# EAGLE board Hauptplatine (EAGLE 7.1.0)
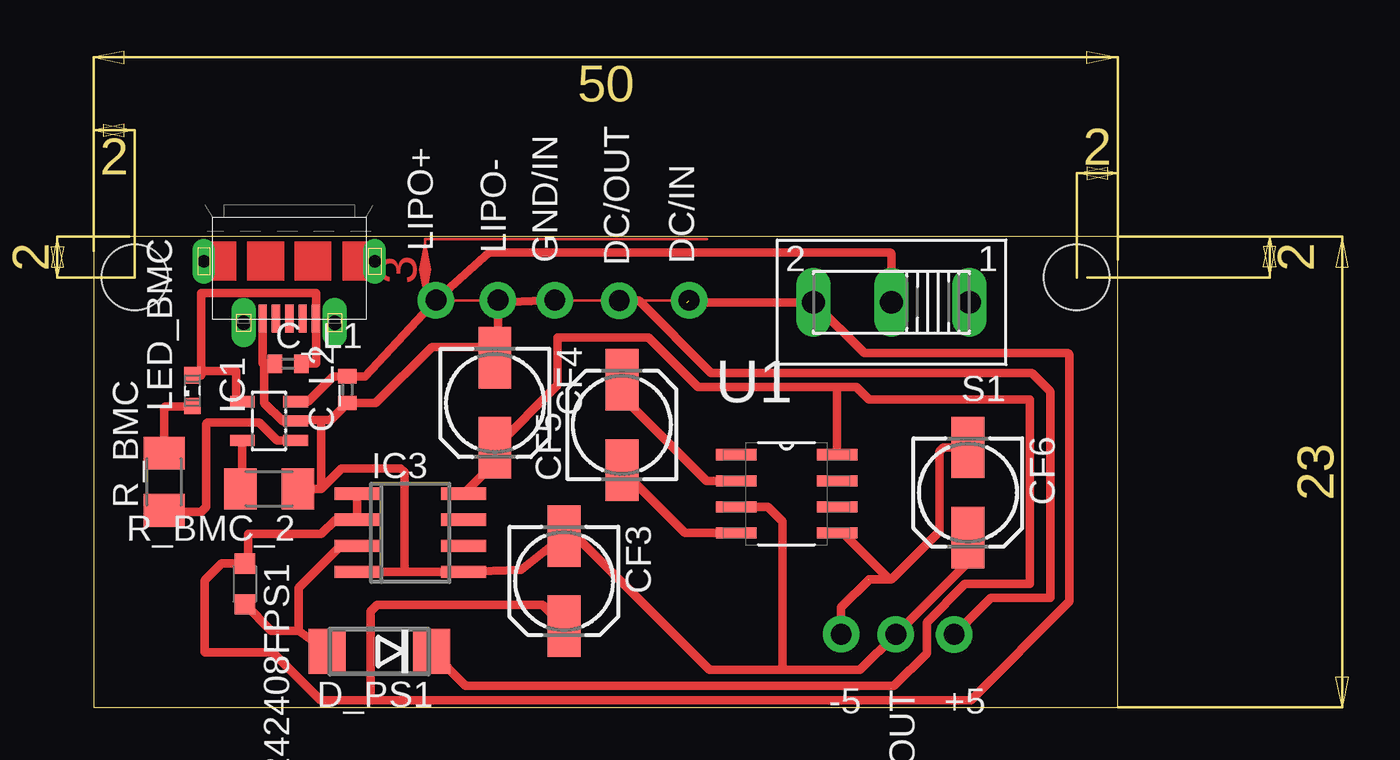
[diagram p0: board, top side]

Size 50 x 23 mm. Coordinates in mm from the lower left corner, seen from the top.
Outline: 0,0 50,0 50,23 0,23 0,0
Copper layers (1*16): Top 0.035mm / dielectric 1.5mm / Bottom 0.035mm
Design rules "default": minimum track width 10mil, minimum drill 24mil, track to track 8mil, track to pad 8mil, pad to pad 8mil, via to via 8mil, smd to smd 8mil, copper to edge 40mil, drill to drill 8mil, minimum pad ring 10mil, minimum via ring 8mil, stop-mask expansion 4mil, vias tented up to drill 0mil, thermal gap 10mil
Holes 3.2 mm at 2,21 48,21

## Footprints (pad centres in the part's own frame; a part is rotated, then mirrored left to right if it is on the bottom)
1X01-CLEANBIG = drill 1.016 pad 1.778: 1 0,0
C0402 = smd 0.7 x 0.9: 1 -0.65,0; 2 0.65,0
153CLV-0505 = smd 3 x 1.6: + 2.2,0; - -2.2,0
DO214AA = smd 1.8 x 2.2: A 2.55,0; C -2.55,0
SOT23-5L = smd 0.55 x 1.2: 1 -0.95,-1.3; 2 0,-1.3; 3 0.95,-1.3; 4 0.95,1.3; 5 -0.95,1.3
SO08 = smd 0.6 x 2.2: 1 -1.905,-2.6; 2 -0.635,-2.6; 3 0.635,-2.6; 4 1.905,-2.6; 5 1.905,2.6; 6 0.635,2.6; 7 -0.635,2.6; 8 -1.905,2.6
L2012C = smd 1 x 1: 1 -1,0; 2 1,0
LED_SML0603 = smd 0.8 x 0.8: A 0.75,0; C -0.75,0
M1206 = smd 1.6 x 2: 1 -1.4,0; 2 1.4,0
255SB = drill 1.118 long: 1 -3.81,0; 2 0,0; 3 3.81,0
SOIC127P600X175-8N = smd 1.981 x 0.559: 1 -2.464,1.905; 2 -2.464,0.635; 3 -2.464,-0.635; 4 -2.464,-1.905; 5 2.464,-1.905; 6 2.464,-0.635; 7 2.464,0.635; 8 2.464,1.905
47589-0001 = smd 1.35 x 0.4: 1 2.8,1.3; 2 2.8,0.65; 3 2.8,0; 4 2.8,-0.65; 5 2.8,-1.3 | drill 0.6 pad 0.95 long: CASING1 0,4.175; CASING2 0,-4.175 | drill 0.7 pad 1.1 long: CASING3 3,2.225; CASING4 3,-2.225

## Placement (x,y rotation side)
+5  [1X01-CLEANBIG]  42.02,3.56 0 top
-5  [1X01-CLEANBIG]  36.5,3.57 0 top
C_L1  4,7uF  [C0402]  9.49,16.79 0 top
C_L2  4,7uF  [C0402]  12.39,15.52 90 top
CF3  10uF  [153CLV-0505]  22.96,6.17 270 top
CF4  33uF  [153CLV-0505]  19.59,14.87 270 top
CF5  10uF  [153CLV-0505]  25.79,13.79 90 top
CF6  10uF  [153CLV-0505]  42.68,10.49 270 top
D_PS1  [DO214AA]  13.94,2.73 180 top
DC/IN  [1X01-CLEANBIG]  29.07,19.88 0 top
DC/OUT  [1X01-CLEANBIG]  25.66,19.87 0 top
GND/IN  [1X01-CLEANBIG]  22.51,19.89 0 top
GND/OUT  [1X01-CLEANBIG]  39.16,3.57 0 top
IC1  MCP73831/OT  [SOT23-5L]  8.56,13.98 90 top
IC3  LT1111CS8  [SO08]  15.45,8.53 270 top
L-242408FPS1  22uH  [L2012C]  7.38,6.03 270 top
LED_BMC  [LED_SML0603]  4.83,15.47 90 top
LIPO+  [1X01-CLEANBIG]  16.71,19.89 90 top
LIPO-  [1X01-CLEANBIG]  19.74,19.89 0 top
R_BMC  470Ω  [M1206]  3.43,11.01 90 top
R_BMC_2  2kΩ  [M1206]  8.57,10.68 180 top
S1  [255SB]  38.95,19.78 180 top
U1  ICL7660ACBAZA-T  [SOIC127P600X175-8N]  33.83,10.43 0 top
U$2  MICRO-USB-RECEPTACLE47589-0001  [47589-0001]  9.55,21.79 270 top

## Library data of the parts
+5 -5 DC/IN DC/OUT GND/IN GND/OUT IC1 LIPO+ LIPO- = adafruit
C_L1 C_L2 = resistor; SPICEPREFIX: C
CF3-CF6 L-242408FPS1 = resistor
D_PS1 = mbrs120t3
IC3 = linear-technology-2
LED_BMC = eagle-ltspice; SPICEMODEL: NONE; SPICEPREFIX: D; SPICETYPE: diode
R_BMC R_BMC_2 = resistor; SPICEPREFIX: R
S1 = switch
U1 = ICL7660ACBAZA-T; DESCRIPTION: Voltage Regulators - Switching Regulators W/ANNEAL CMOS VAGE CNVRTR COM TAPE&E RoHS: Com; DIGI-KEY_PART_NUMBER: ICL7660ACBAZA-TCT-ND; DIGI-KEY_PURCHASE_URL: https://www.digikey.com/product-detail/en/renesas-electronics-america-inc/ICL7660ACBAZA-T/ICL7660ACBAZA-TCT-ND/1033961?utm_source=snapeda&utm_medium=aggregator&utm_campaign=symbol; MF: Renesas Electronics; MP: ICL7660ACBAZA-T; PACKAGE: SOIC-8 Intersil
U$2 = con-molex-usb

## Nets
+5V: +5.1 DC/OUT.1
-5V: -5.1 CF6.- U1.5
GND: C_L1.1 C_L2.1 CF3.- CF4.- CF6.+ GND/IN.1 GND/OUT.1 IC1.2 IC3.4 IC3.5 LIPO-.1 R_BMC_2.1 U1.3 U$2.5
N$1: CF3.+ DC/IN.1 IC3.1 IC3.2 L-242408FPS1.1 S1.3
N$3: CF5.- U1.4
N$4: CF5.+ U1.2
N$24: C_L1.2 IC1.4 LED_BMC.A U$2.1
N$25: LED_BMC.C R_BMC.2
N$26: IC1.1 R_BMC.1
N$28: IC1.5 R_BMC_2.2
N$29: C_L2.2 IC1.3 LIPO+.1 S1.2
N$69: D_PS1.A IC3.3 L-242408FPS1.2
N$70: CF4.+ D_PS1.C IC3.8 U1.8

## Tracks (layer width: path | path; a pad name or v marks a point on that pad's centre or on a via)
+5V
  Top 0.406: +5.1 43.8,5.34 46.71,5.34 46.71,15.44 45.81,16.34 31.15,16.34 31.14,16.34 30.14,16.34 26.61,19.87 DC/OUT.1
-5V  (1 unrouted)
  Top 0.406: 37.84,6.26 38.85,6.26 | 38.85,6.26 38.96,6.26 41.3,8.6 41.3,12.5 41.5,12.7 CF6.- | -5.1 36.49,4.88 37.84,6.23 | U1.5 36.59,8.52 38.85,6.26
GND
  Top 0.406: U$2.5 8.25,16.79 C_L1.1 8.34,16.79 8.32,16.81 8.32,14.88 9.24,13.96 9.83,13.96 IC1.2 9.86,14.04 11.11,14.04 | R_BMC_2.1 11.11,10.68 | 11.11,10.68 11.11,14.04 | 11.11,14.04 11.56,14.04 C_L2.1 13.77,14.87 16.51,17.61 19.3,17.61 CF4.- 19.74,17.34 LIPO-.1 19.77,19.78 GND/IN.1 | CF6.+ 42.68,7.08 GND/OUT.1 37.42,1.82 33.51,1.82 | IC3.4 15.18,6.62 | 15.18,6.62 IC3.5 20.86,6.71 CF3.- 23.52,8.37 30.07,1.82 33.51,1.82 | 11.11,10.68 12.11,11.68 14.99,11.68 15.18,11.49 15.18,6.62 | U1.3 32.92,9.79 33.64,9.07 33.64,1.95 33.51,1.82
N$1  (1 unrouted)
  Top 0.406: IC3.1 IC3.2 11.8,9.16 11.11,8.47 7.55,8.47 7.54,8.48 7.54,7.19 L-242408FPS1.1 | L-242408FPS1.1 7.33,7.08 | 28.96,19.78 S1.3 37.63,17.3 47.57,17.3 47.65,17.22 47.65,5.17 42.83,0.35 19.64,0.35 19.63,0.35 13.52,0.35 | CF3.+ 21.92,5.01 13.84,5.01 13.52,4.7 13.52,0.35 | 13.52,0.35 11.08,0.35 8.73,2.69 5.42,2.69 5.42,6.2 6.25,7.03 L-242408FPS1.1
N$3
  Top 0.406: U1.4 28.87,8.52 CF5.-
N$4
  Top 0.406: U1.2 29.93,11.06 25.8,15.19 25.8,15.98 CF5.+
N$24
  Top 0.406: C_L1.2 10.85,16.79 U$2.1 10.85,20.24 5.25,20.24 5.25,16.22 LED_BMC.A 4.83,16.43 6.95,16.43 6.95,14.93 IC1.4
N$25
  Top 0.406: LED_BMC.C 4.8,14.69 3.49,14.69 3.43,14.63 R_BMC.2
N$26
  Top 0.406: IC1.1 8.95,13.04 8.08,13.91 5.56,13.91 5.49,13.85 5.49,9.8 5.25,9.55 3.49,9.55 R_BMC.1
N$28
  Top 0.406: IC1.5 7.26,10.77 R_BMC_2.2
N$29
  Top 0.406: IC1.3 10.47,14.93 11.7,16.17 C_L2.2 13.24,16.17 LIPO+.1 19.29,22.22 38.9,22.22 38.95,22.17 S1.2
N$69
  Top 0.406: L-242408FPS1.2 8.68,3.74 10.02,3.74 | 10.02,3.74 D_PS1.A | IC3.3 12.06,7.89 10.02,5.85 10.02,3.74
N$70
  Top 0.406: IC3.8 19.59,11.97 CF4.+ 22.66,15.75 22.66,18.06 | 36.41,15.65 29.5,15.65 27.09,18.06 22.66,18.06 | 36.41,15.65 37.23,15.65 37.84,15.04 45.7,15.04 45.7,6.03 45.72,6.02 43.07,6.02 42.53,6.02 40.67,4.15 40.67,2.64 39.08,1.05 18.17,1.05 D_PS1.C | 22.66,18.06 | U1.8 36.29,15.54 36.41,15.65
(copper drawn outside any net)
  shapes: Top area x1